# EAGLE board Super_Clokk_199774_2015_03_30 (EAGLE 7.7.0), part 1 of 2
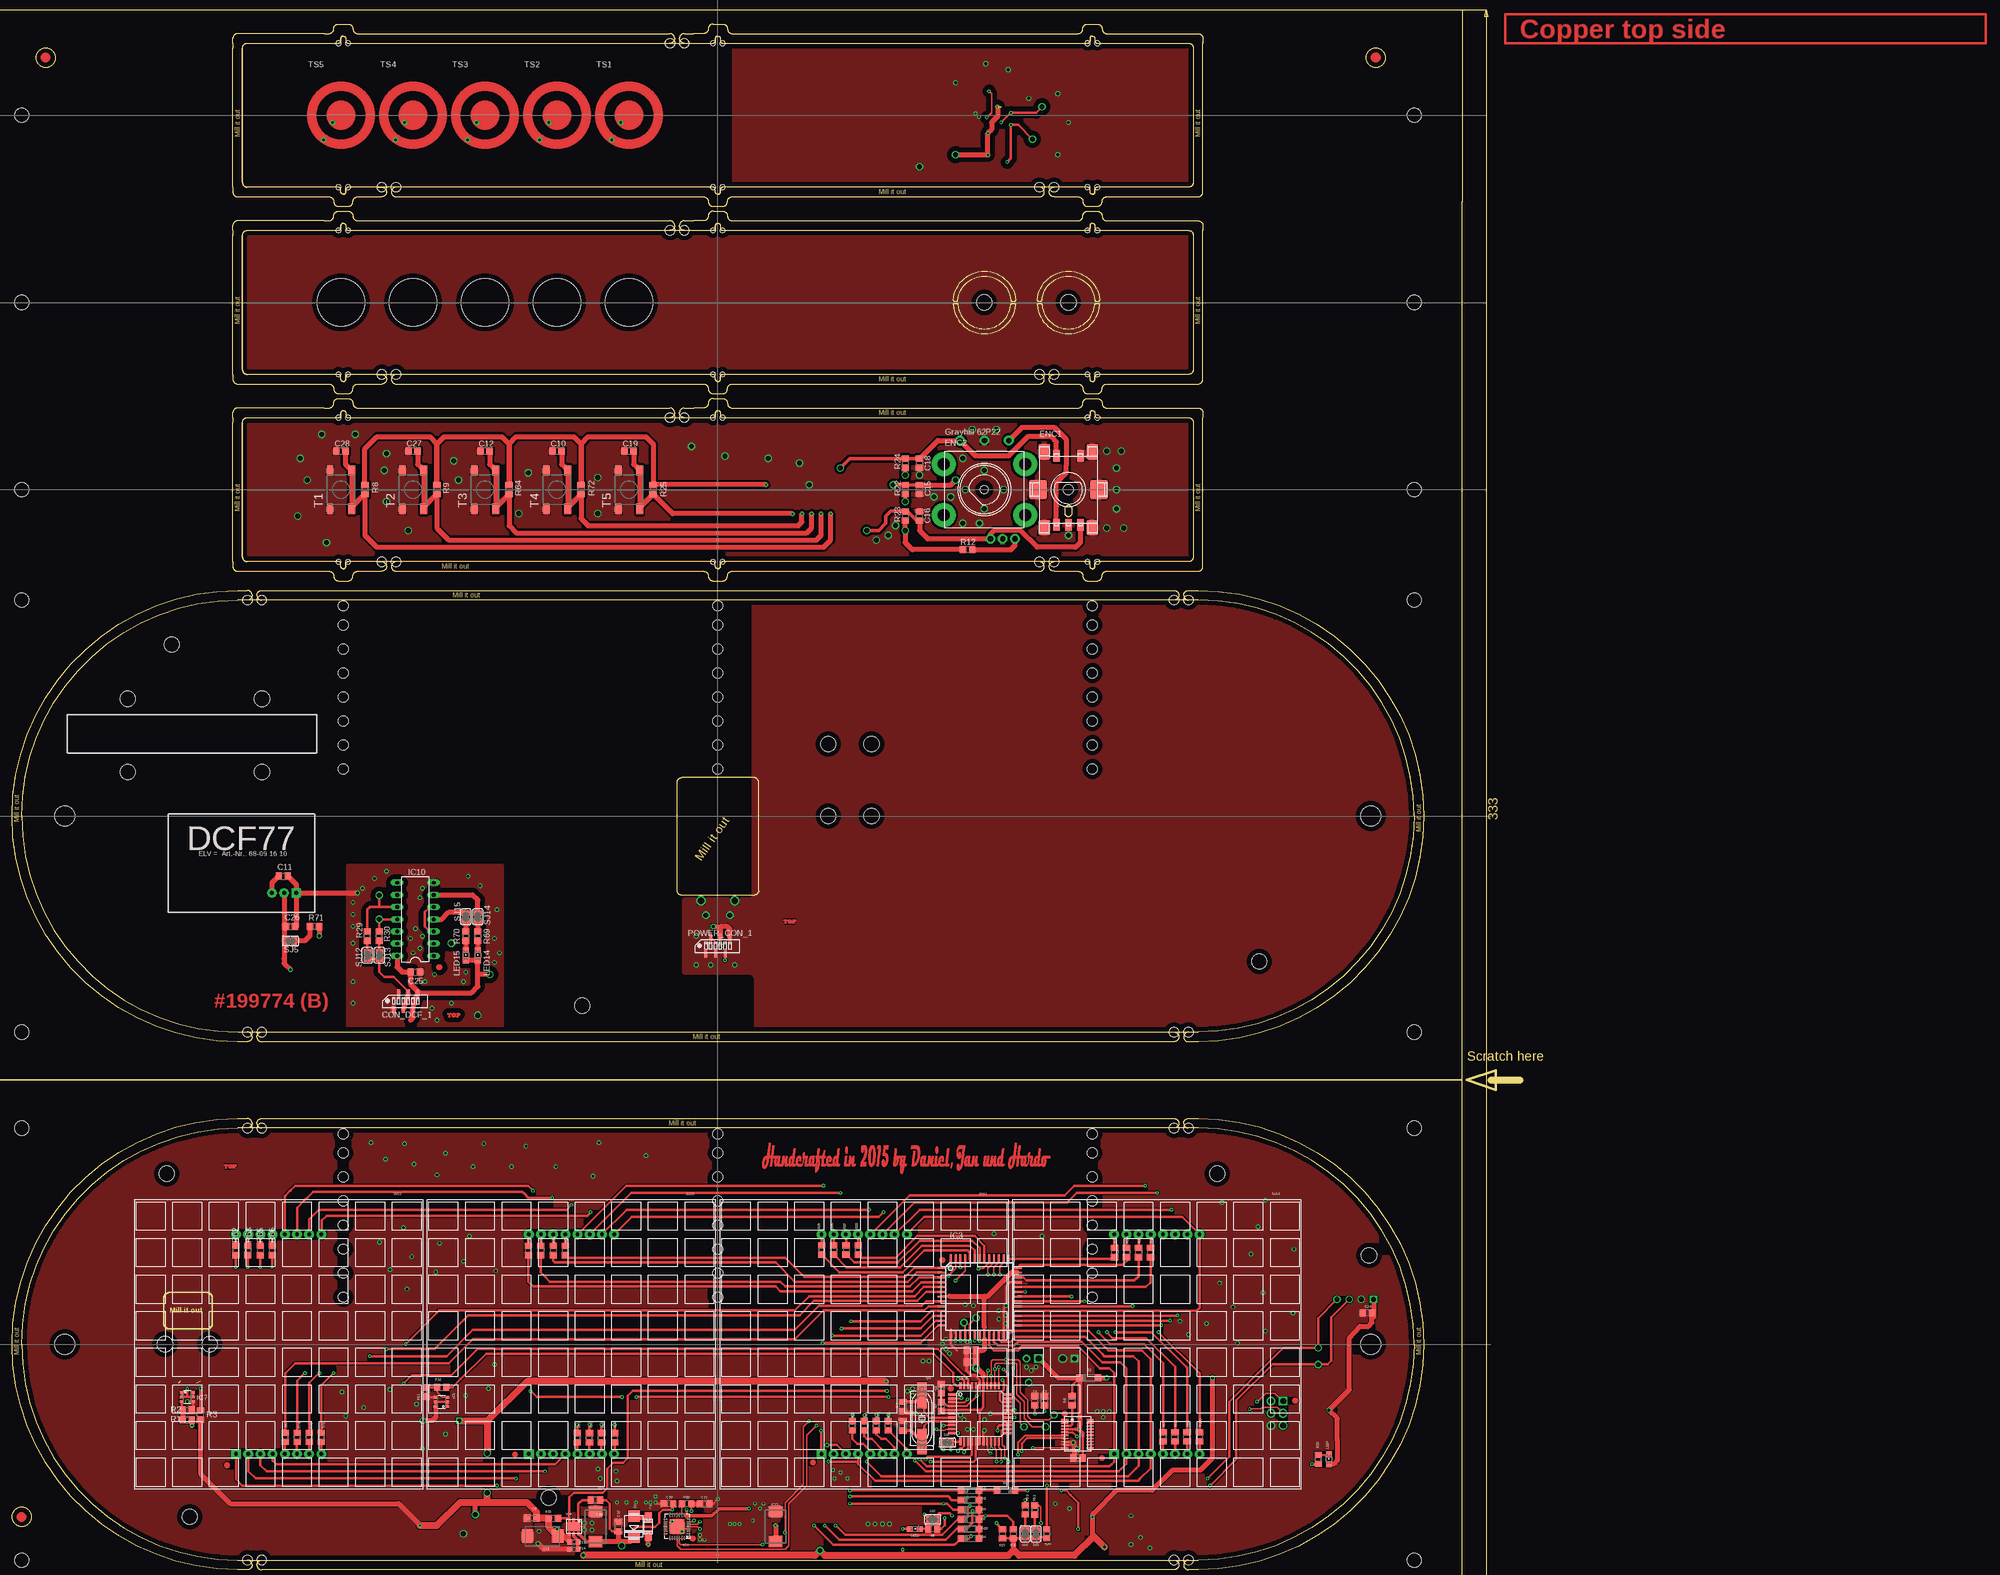
[diagram p0: board, top side]
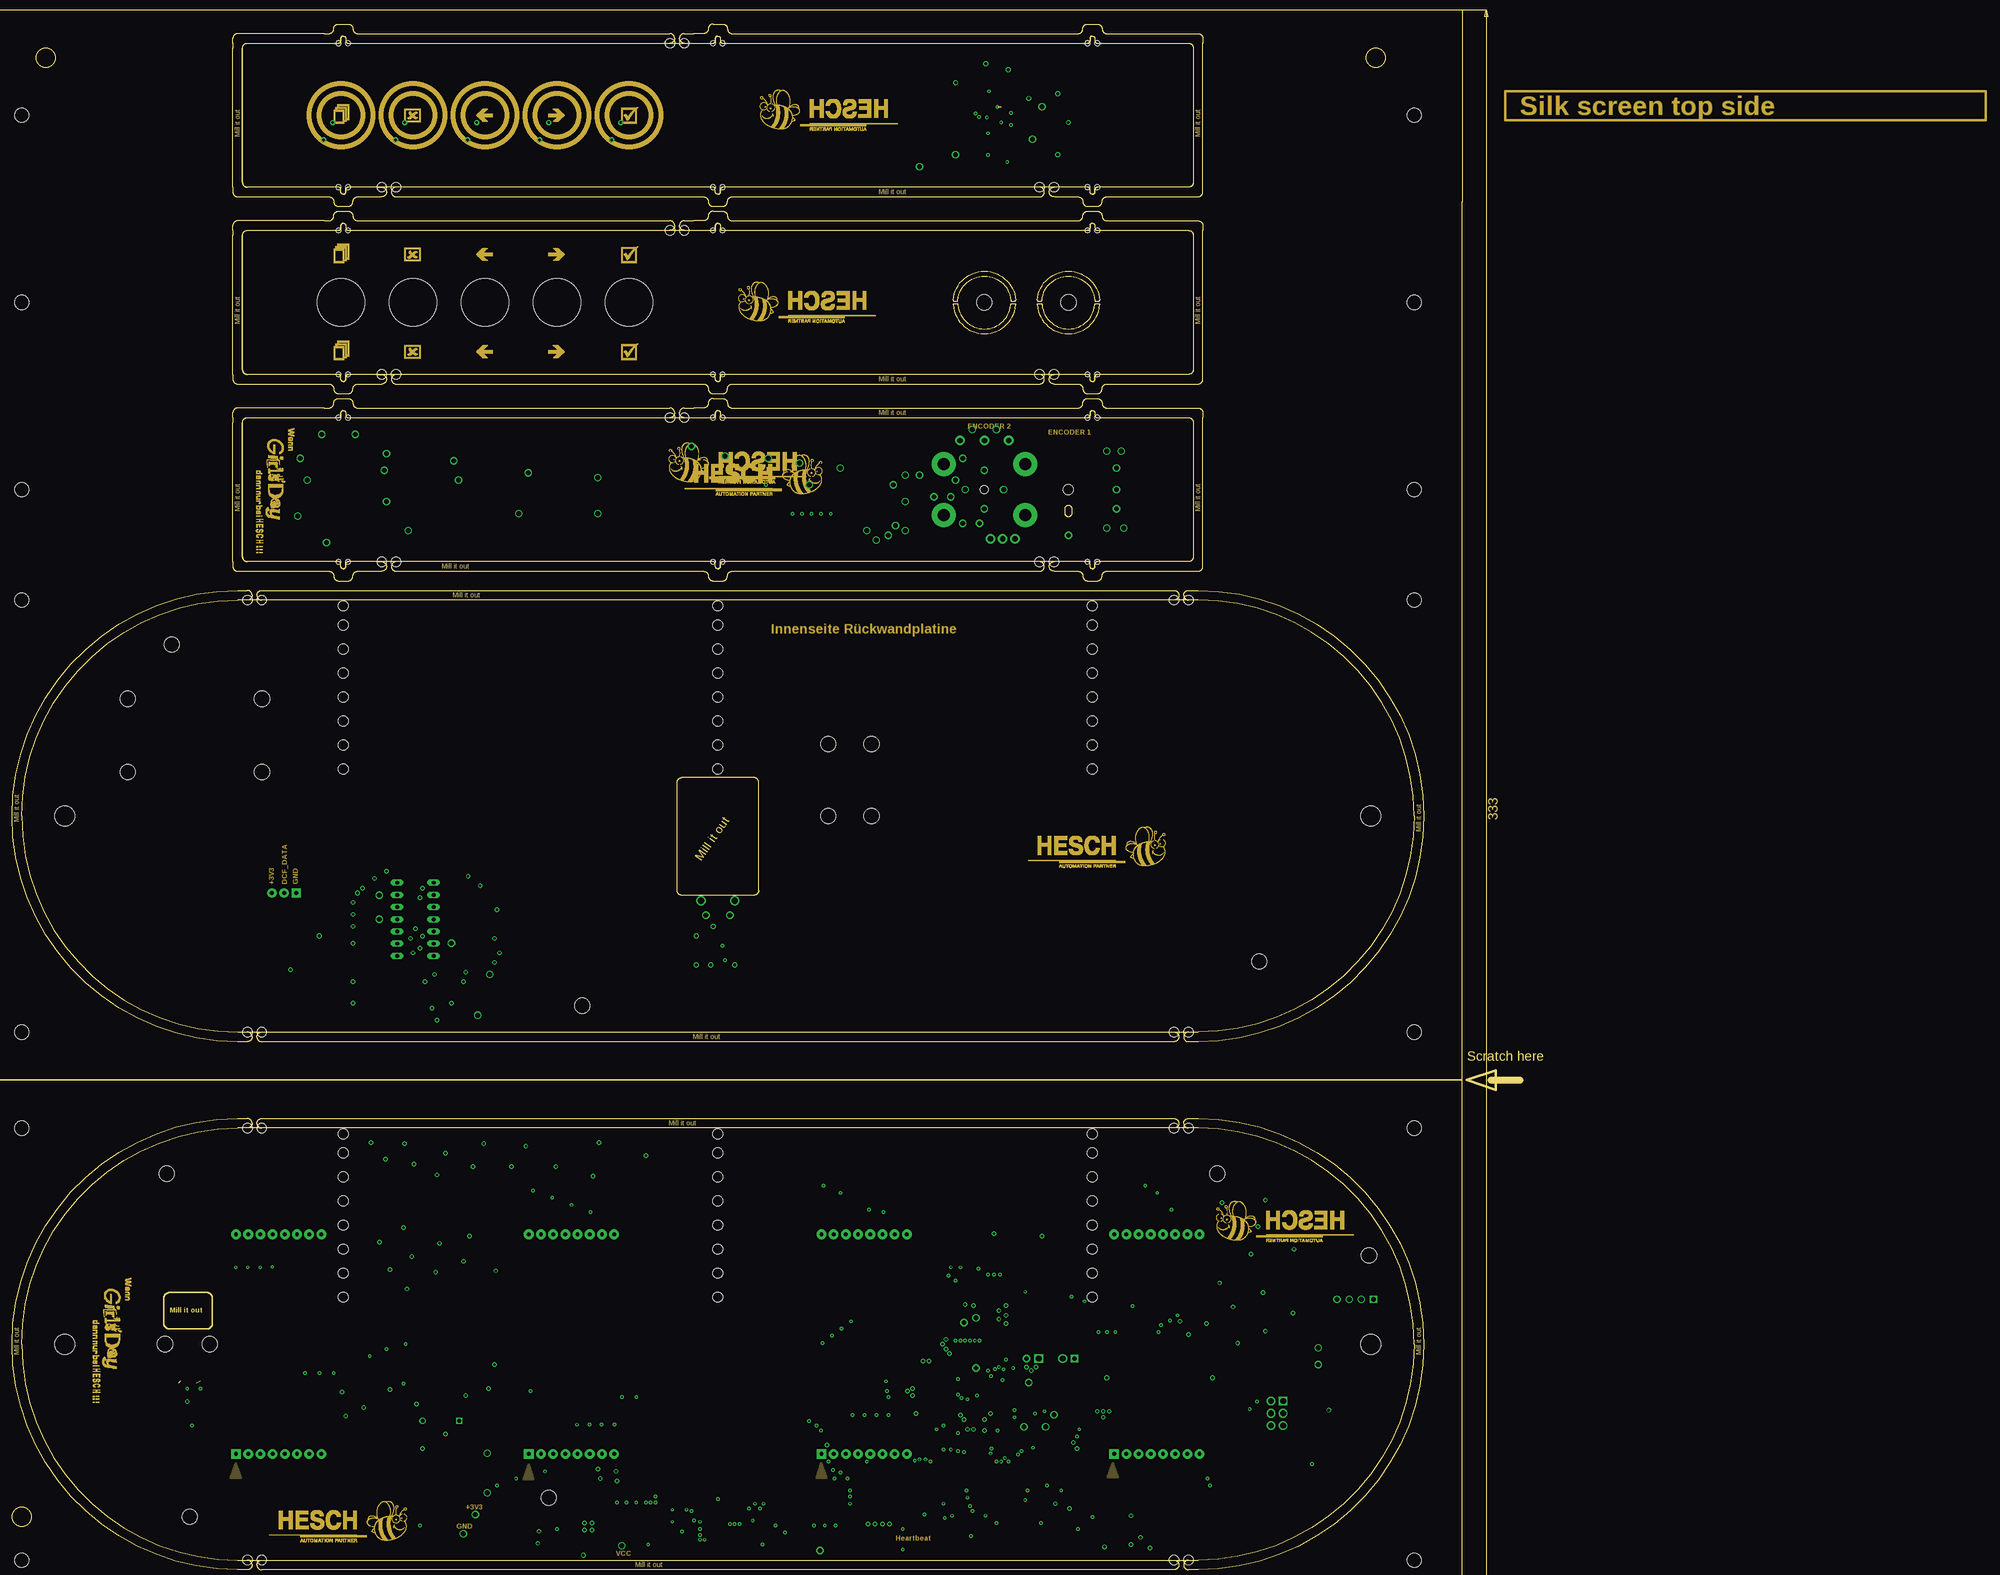
[diagram p1: board, inner layer Route2]
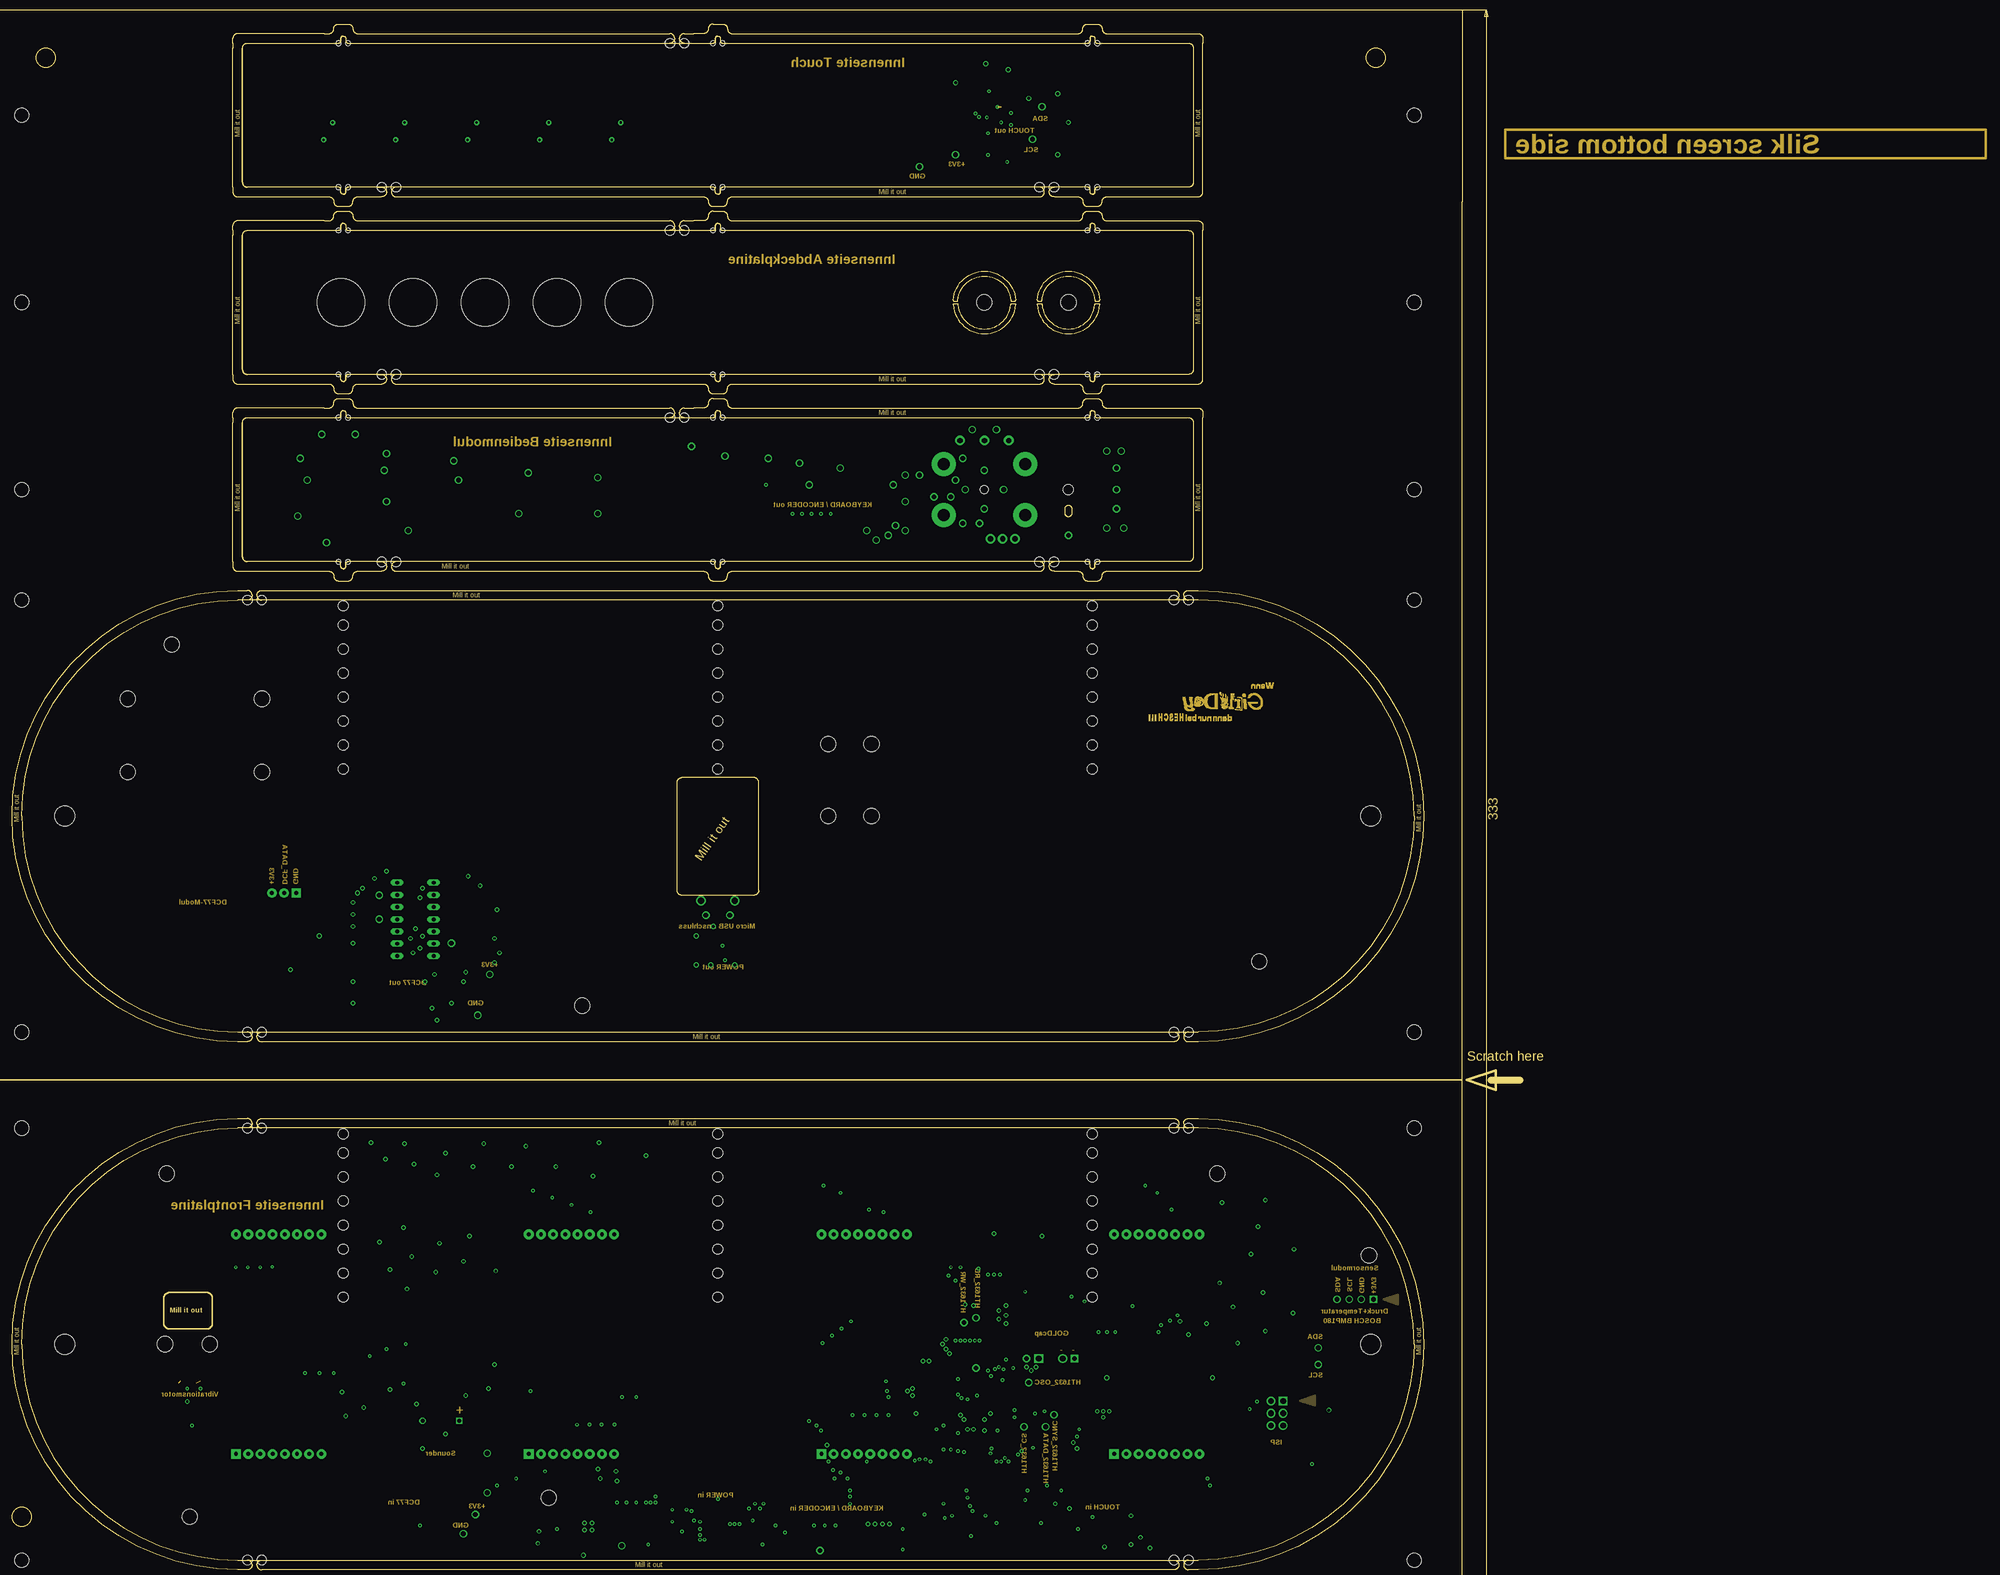
[diagram p2: board, inner layer Route15]
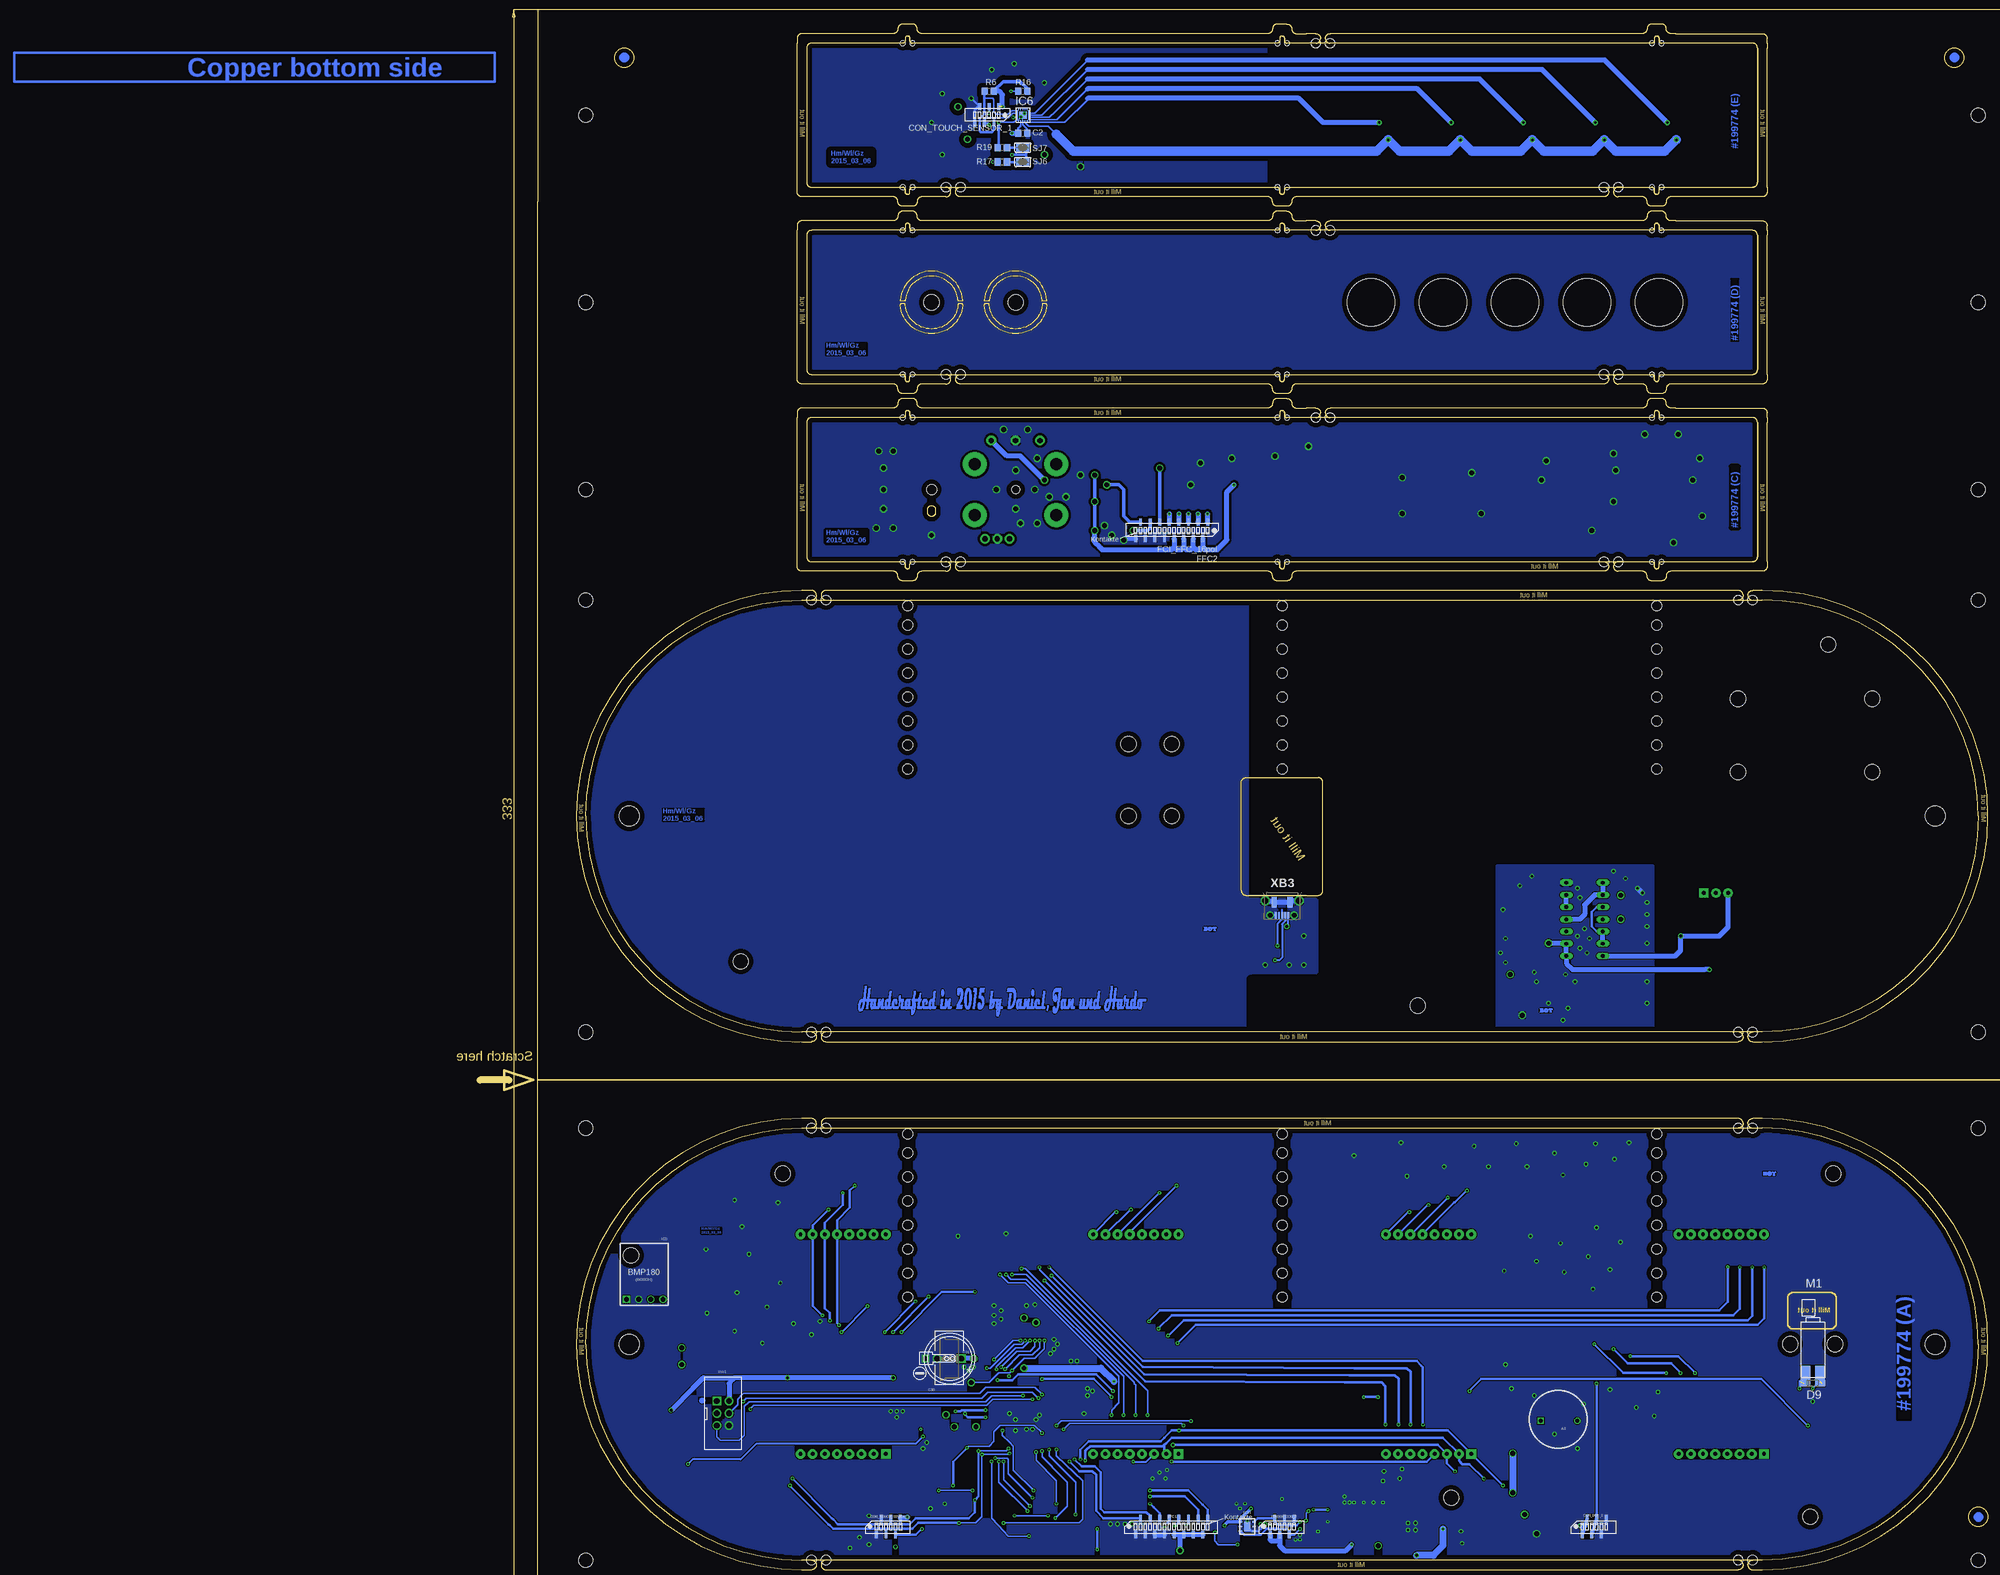
[diagram p3: board, bottom side, seen from below]

Size 292 x 317.5 mm. Coordinates in mm from the lower left corner, seen from the top.
Copper layers (1*16): Top 0.035mm / dielectric 1.5mm / Bottom 0.035mm
Design rules "default *": minimum track width 10mil, minimum drill 24mil, track to track 8mil, track to pad 8mil, pad to pad 8mil, via to via 8mil, smd to smd 8mil, copper to edge 40mil, drill to drill 8mil, minimum pad ring 10mil, minimum via ring 8mil, stop-mask expansion 4mil, vias tented up to drill 50mil, thermal gap 10mil
Holes 10 mm at 128.5,262 113.5,262 98.5,262 83.5,262 68.5,262
Holes 3.2 mm at 33.25,190.75 259.75,124.75 118.75,115.5 32.25,80.5 251,80.5 111.75,13 170,170 170,155 179,170 179,155 37,9 202.5,262 220,262
tRestrict: area 48,286 to 148,316
bRestrict: area 48,286 to 148,316
Milling: 40 lines

## Footprints (pad centres in the part's own frame; a part is rotated, then mirrored left to right if it is on the bottom)
FUCW03 = drill 0.8 square: + -3.91,0 | drill 0.8: - 3.71,0
18X23MM = drill 0.8 pad 1.93 square: 1 26.7,3.96 | drill 0.8 pad 1.93: 2 24.16,3.96; 3 21.62,3.96 | hole 3.2: -8.37,29.21; -8.37,44.45; 19.57,29.21; 19.57,44.45
C0805 = smd 1.3 x 1.5: 1 -0.95,0; 2 0.95,0
C0805K = smd 1.3 x 1.6: 1 -1,0; 2 1,0
SMC_D = smd 2.4 x 2.8: + -3.15,0; - 3.15,0
PANASONIC_SD_SERIES_STEHEND = drill 1.2 square: + -2.54,-6.35 | drill 1.2: - 2.46,-6.35
PANASONIC_SD_SERIES_LIEGEND = drill 1 square: MINUS 10,0 | drill 1: PLUS 0,0
MOLEX_52808-0671_NON_ZIF = smd 0.6 x 1.45: 1 -2.5,-1.75; 2 -1.5,1.7; 3 -0.5,-1.75; 4 0.5,1.7; 5 1.5,-1.75; 6 2.5,1.7
SOD123 = smd 1.4 x 1.4: A 1.9,0; C -1.9,0
DO-214AA/SMB = smd 2.4 x 2.4: A 2.2,0; C -2.2,0
TOYO = drill 0.8 pad 2 square: 1 -8.89,-22.86 | drill 0.8 pad 2: 2 -6.35,-22.86; 3 -3.81,-22.86; 4 -1.27,-22.86; 5 1.27,-22.86; 6 3.81,-22.86; 7 6.35,-22.86; 8 8.89,-22.86; 9 8.89,22.86; 10 6.35,22.86; 11 3.81,22.86; 12 1.27,22.86; 13 -1.27,22.86; 14 -3.81,22.86; 15 -6.35,22.86; 16 -8.89,22.86
BOURNS_PEC11S = smd 1.3 x 2.4: A -2.5,-7.3; B 2.5,-7.3; C 0,-7.3; D -2.5,7; E 2.5,7 | smd 2.5 x 3.2: SHIELD_1 -5,-7.9; SHIELD_2 5,-7.9; SHIELD_4 5,7.9; SHIELD_5 -5,7.9 | smd 3.75 x 4: SHIELD_3 6.375,0; SHIELD_6 -6.375,0 | hole 2.1: 0,0
62P22 = drill 1.1 pad 2: 1 6.35,-10.236; 2 3.81,-10.236; 3 1.27,-10.236; 4 5.08,10.236; 5 0,10.236; 6 -5.08,10.236 | drill 2.5 pad 5: FASTENER_1 8.495,5.27; FASTENER_2 -8.505,5.27; FASTENER_3 8.495,-5.27; FASTENER_4 -8.505,-5.27 | hole 1.7: 0,0
1206L = smd 2.16 x 1.4: 1 -1.85,0; 2 1.85,0
MOLEX_52808_1671_NON_ZIF = smd 0.6 x 1.45: 1 -7.5,-1.75; 2 -6.5,1.7; 3 -5.5,-1.75; 4 -4.5,1.7; 5 -3.5,-1.75; 6 -2.5,1.7; 7 -1.5,-1.75; 8 -0.5,1.7; 9 0.5,-1.75; 10 1.5,1.7; 11 2.5,-1.75; 12 3.5,1.7; 13 4.5,-1.75; 14 5.5,1.7; 15 6.5,-1.75; 16 7.5,1.7
QFN28 = smd 1 x 0.3: 1 -2.4,1.5; 2 -2.4,1; 3 -2.4,0.5; 4 -2.4,0; 5 -2.4,-0.5; 6 -2.4,-1; 7 -2.4,-1.5; 15 2.4,-1.5; 16 2.4,-1; 17 2.4,-0.5; 18 2.4,0; 19 2.4,0.5; 20 2.4,1; 21 2.4,1.5 | smd 0.3 x 1: 8 -1.5,-2.4; 9 -1,-2.4; 10 -0.5,-2.4; 11 0,-2.4; 12 0.5,-2.4; 13 1,-2.4; 14 1.5,-2.4; 22 1.5,2.4; 23 1,2.4; 24 0.5,2.4; 25 0,2.4; 26 -0.5,2.4; 27 -1,2.4; 28 -1.5,2.4 | smd 3 x 3: THERMAL 0,0
VSOJ20 = smd 0.35 x 1.5: 1 0,0; 2 0.65,0; 3 1.3,0; 4 1.95,0; 5 2.6,0; 6 3.25,0; 7 3.9,0; 8 4.55,0; 9 5.2,0; 10 5.85,0; 11 5.85,5.3; 12 5.2,5.3; 13 4.55,5.3; 14 3.9,5.3; 15 3.25,5.3; 16 2.6,5.3; 17 1.95,5.3; 18 1.3,5.3; 19 0.65,5.3; 20 0,5.3
52PIN_OFP = smd 0.4 x 1.7: 1 -6,-7.9; 2 -5,-7.9; 3 -4,-7.9; 4 -3,-7.9; 5 -2,-7.9; 6 -1,-7.9; 7 0,-7.9; 8 1,-7.9; 9 2,-7.9; 10 3,-7.9; 11 4,-7.9; 12 5,-7.9; 13 6,-7.9; 27 6,7.9; 28 5,7.9; 29 4,7.9; 30 3,7.9; 31 2,7.9; 32 1,7.9; 33 0,7.9; 34 -1,7.9; 35 -2,7.9; 36 -3,7.9; 37 -4,7.9; 38 -5,7.9; 39 -6,7.9 | smd 1.7 x 0.4: 14 7.9,-6; 15 7.9,-5; 16 7.9,-4; 17 7.9,-3; 18 7.9,-2; 19 7.9,-1; 20 7.9,0; 21 7.9,1; 22 7.9,2; 23 7.9,3; 24 7.9,4; 25 7.9,5; 26 7.9,6; 40 -7.9,6; 41 -7.9,5; 42 -7.9,4; 43 -7.9,3; 44 -7.9,2; 45 -7.9,1; 46 -7.9,0; 47 -7.9,-1; 48 -7.9,-2; 49 -7.9,-3; 50 -7.9,-4; 51 -7.9,-5; 52 -7.9,-6
DFN6 = smd 0.7 x 0.45: 1 -1.37,0.953; 2 -1.37,0.003; 3 -1.37,-0.947; 4 1.43,-0.947; 5 1.43,0.003; 6 1.43,0.953 | smd 1.75 x 2.5: EXP 0.03,0.003
SOT457 = smd 0.55 x 0.8: 1 -0.95,-1.2; 2 0,-1.2; 3 0.95,-1.2; 4 0.95,1.2; 5 0,1.2; 6 -0.95,1.2
VQFN-20 = smd 0.4 x 0.22: 1 1.24,0.9; 2 1.24,0.45; 3 1.24,0; 4 1.24,-0.45; 5 1.24,-0.9; 11 -1.24,-0.9; 12 -1.24,-0.45; 13 -1.24,0; 14 -1.24,0.45; 15 -1.24,0.9 | smd 0.22 x 0.4: 6 0.9,-1.24; 7 0.45,-1.24; 8 0,-1.24; 9 -0.45,-1.24; 10 -0.9,-1.24; 16 -0.9,1.24; 17 -0.45,1.24; 18 0,1.24; 19 0.45,1.24; 20 0.9,1.24 | smd 1.55 x 1.55: EXP. 0,0
TQFP44 = smd 1.5 x 0.5: 1 -5.8,4; 2 -5.8,3.2; 3 -5.8,2.4; 4 -5.8,1.6; 5 -5.8,0.8; 6 -5.8,0; 7 -5.8,-0.8; 8 -5.8,-1.6; 9 -5.8,-2.4; 10 -5.8,-3.2; 11 -5.8,-4; 23 5.8,-4; 24 5.8,-3.2; 25 5.8,-2.4; 26 5.8,-1.6; 27 5.8,-0.8; 28 5.8,0; 29 5.8,0.8; 30 5.8,1.6; 31 5.8,2.4; 32 5.8,3.2; 33 5.8,4 | smd 0.5 x 1.5: 12 -4,-5.8; 13 -3.2,-5.8; 14 -2.4,-5.8; 15 -1.6,-5.8; 16 -0.8,-5.8; 17 0,-5.8; 18 0.8,-5.8; 19 1.6,-5.8; 20 2.4,-5.8; 21 3.2,-5.8; 22 4,-5.8; 34 4,5.8; 35 3.2,5.8; 36 2.4,5.8; 37 1.6,5.8; 38 0.8,5.8; 39 0,5.8; 40 -0.8,5.8; 41 -1.6,5.8; 42 -2.4,5.8; 43 -3.2,5.8; 44 -4,5.8
10X13MM = drill 1 square: 1 1.27,1.27 | drill 1: 2 3.81,1.27; 3 6.35,1.27; 4 8.89,1.27 | hole 3.2: 2.223,10.477
DIL14 = drill 0.813 long: 1 -7.62,-3.81; 2 -5.08,-3.81; 3 -2.54,-3.81; 4 0,-3.81; 5 2.54,-3.81; 6 5.08,-3.81; 7 7.62,-3.81; 8 7.62,3.81; 9 5.08,3.81; 10 2.54,3.81; 11 0,3.81; 12 -2.54,3.81; 13 -5.08,3.81; 14 -7.62,3.81
DRS = smd 0.35 x 0.9: 1 -0.95,-1.425; 2 0,-1.425; 3 0.95,-1.425; 4 0.95,1.425; 5 0,1.425; 6 -0.95,1.425 | smd 1.9 x 1.2: THERMAL 0,0
CHIPLED_0805 = smd 1.2 x 1.2: A 0,-1.05; C 0,1.05
LA4-432A = smd 4 x 2: 1 -0.5,-1.5; 2 -0.5,1.5 | hole 3.2: -7,4.65; -7,-4.65
PLATINENKONTUR_310X220_FULLY_ROUNDED = hole 4.2: 19,55; 291,55; 19,165; 291,165 | hole 2: 253,100; 250,100; 253,10; 250,10; 57,10; 60,10; 57,100; 60,100; 253,210; 250,210; 253,120; 250,120; 57,120; 60,120; 57,210; 60,210; 85,218; 88,218; 225,218; 222,218; 145,248; 148,248; 85,257; 88,257; 225,257; 222,257; 145,287; 148,287; 85,296; 88,296; 225,296; 222,296; 145,326; 148,326 | hole 3: 10,210; 300,210; 300,120; 300,100; 300,10; 10,10; 10,120; 10,100; 300,272; 300,233; 10,233; 10,272; 300,311; 10,311 | hole 1: 76,218; 78,218; 78,248; 76,248; 154,218; 156,218; 154,248; 156,248; 234,248; 232,248; 232,218; 234,218; 76,257; 78,257; 78,287; 76,287; 154,257; 156,257; 154,287; 156,287; 234,287; 232,287; 232,257; 234,257; 76,296; 78,296; 78,326; 76,326; 154,296; 156,296; 154,326; 156,326; 234,326; 232,326; 232,296; 234,296 | hole 2.1: 77,208.8; 77,204.8; 77,199.8; 77,194.8; 77,189.8; 77,184.8; 77,179.8; 77,174.8; 77,98.8; 77,94.8; 77,89.8; 77,84.8; 77,79.8; 77,74.8; 77,69.8; 77,64.8; 155,98.8; 155,94.8; 155,89.8; 155,84.8; 155,79.8; 155,74.8; 155,69.8; 155,64.8; 233,98.8; 233,94.8; 233,89.8; 233,84.8; 233,79.8; 233,74.8; 233,69.8; 233,64.8; 155,208.8; 155,204.8; 155,199.8; 155,194.8; 155,189.8; 155,184.8; 155,179.8; 155,174.8; 233,208.8; 233,204.8; 233,199.8; 233,194.8; 233,189.8; 233,184.8; 233,179.8; 233,174.8
HC49 = smd 5.334 x 1.93: 1 -4.826,0; 2 4.826,0
R0805 = smd 1.3 x 1.5: 1 -0.95,0; 2 0.95,0
R0603 = smd 1 x 1.1: 1 -0.85,0; 2 0.85,0
SJ = smd 1.168 x 1.6: 1 -0.762,0; 2 0.762,0
B3S-1002P = smd 2.1 x 1.4: 1 4,-2.25; 2 -4,-2.25; 3 4,2.25; 4 -4,2.25
THT-1X2,54 = drill 1 pad 1.5: TP 0,0
TOUCH_SENSOR_14MM = drill 0.5: GUARD -3.61,-5.12; TOUCH -1.73,-1.54
MICRO_NEU = smd 0.4 x 1.35: 1 -1.3,4.15; 2 -0.65,4.15; 3 0,4.15; 4 0.65,4.15; 5 1.3,4.15 | drill 1.3: 6 -3.5,1.15; 7 3.5,1.15 | drill 1: 8 -2.5,4.15; 9 2.5,4.15 | smd 1.1 x 2.1: 10 -1.65,1.45; 11 1.65,1.45
WSL = drill 1.2 square: 1 -2.54,-1.27 | drill 1.2: 2 -2.54,1.27; 3 0,-1.27; 4 0,1.27; 5 2.54,-1.27; 6 2.54,1.27

## Placement (x,y rotation side)
A1  FUCW03THT  [FUCW03]  89.22,29.04 0 bottom
A3  ELV68-09-16-10  [18X23MM]  32.5,135 0 top
C1  100n  [C0805]  222,21.25 180 top
C2  100n  [C0805]  201,297.25 0 bottom
C3  22p  [C0805K]  185.5,28 90 top
C4  22p  [C0805K]  185.5,32 270 top
C5  100n  [C0805]  193.5,35.75 90 top
C6  100n  [C0805]  213,33.25 90 top
C7  100n  [C0805]  215,33.25 90 top
C8  1u  [C0805K]  108.25,8.75 180 top
C9  100n  [C0805]  199.75,41.25 180 top
C10  100n  [C0805]  113.5,231 180 top
C11  100n  [C0805]  56.5,142.5 0 top
C12  100n  [C0805]  98.5,231 180 top
C14  100n  [C0805]  199.75,43.75 0 top
C15  100n  [C0805]  189,223 270 top
C16  100n  [C0805]  189,217.5 90 top
C17  1u  [C0805K]  126.25,7 90 top
C18  100n  [C0805]  189,228.5 270 top
C19  100n  [C0805]  128.5,231 180 top
C20  100n  [C0805]  136.75,11.75 180 top
C21  100n  [C0805]  144.25,11.75 0 top
C22  100µ  [SMC_D]  159,7 90 top
C23  100µ  [SMC_D]  110.5,5 180 top
C24  100n  [C0805]  282.25,51.5 180 top
C25  100n  [C0805]  84,122.5 0 top
C26  10n  [C0805]  58,132 0 top
C27  100n  [C0805]  83.5,231 180 top
C28  100n  [C0805]  68.5,231 180 top
C29  100µ  [SMC_D]  121.5,7 90 top
C30  [PANASONIC_SD_SERIES_STEHEND]  216.35,35.65 180 bottom
C31  [PANASONIC_SD_SERIES_LIEGEND]  211.25,42 180 bottom
CON_DCF_1  MOLEX_52808_0671_NON_ZIF  [MOLEX_52808-0671_NON_ZIF]  82,116.5 0 top
CON_DCF_2  MOLEX_52808_0671_NON_ZIF  [MOLEX_52808-0671_NON_ZIF]  82,7 0 bottom
CON_TOUCH_SENSOR_1  MOLEX_52808_0671_NON_ZIF  [MOLEX_52808-0671_NON_ZIF]  208.5,301 180 bottom
CON_TOUCH_SENSOR_2  MOLEX_52808_0671_NON_ZIF  [MOLEX_52808-0671_NON_ZIF]  229,7 0 bottom
D1  BAS116H-115  [SOD123]  224.25,38 0 top
D2  BAS116H-115  [SOD123]  199.5,14.5 0 top
D3  BAS116H-115  [SOD123]  199.5,12.5 0 top
D4  BAS116H-115  [SOD123]  199.5,4.5 0 top
D5  BAS116H-115  [SOD123]  199.5,8.5 0 top
D6  BAS116H-115  [SOD123]  199.5,10.5 0 top
D7  SS24R4  [DO-214AA/SMB]  129.5,7 90 top
D8  BAS116H-115  [SOD123]  207,14.5 180 top
D9  BAS116H-115  [SOD123]  36.5,36.87 0 bottom
D10  BAS116H-115  [SOD123]  199.5,6.5 0 top
DIS1  TOYO-D24882  [TOYO]  55.54,45 0 top
DIS2  TOYO-D24882  [TOYO]  116.5,45 0 top
DIS3  TOYO-D24882  [TOYO]  177.46,45 0 top
DIS4  TOYO-D24882  [TOYO]  238.42,45 0 top
ENC1  BOURNS_PEC11S  [BOURNS_PEC11S]  220,223 0 top
ENC2  Grayhill 62P22  [62P22]  202.5,223 0 top
F2  MF-NSMF200  [1206L]  132.5,7 90 top
FFC1  FCI_FFC_16pol  [MOLEX_52808_1671_NON_ZIF]  170,7 0 bottom
FFC2  FCI_FFC_16pol  [MOLEX_52808_1671_NON_ZIF]  170,214.5 180 bottom
IC1  CP2102SMD  [QFN28]  138.5,7 180 top
IC2  [VSOJ20]  219.25,29.25 270 top
IC3  HT1632-C  [52PIN_OFP]  201.5,54.9 270 top
IC4  LD39050PUR  [DFN6]  117,7 270 top
IC5  PMN28-UN  [SOT457]  89.43,32.97 90 top
IC6  AT42QT2120-MMH  [VQFN-20]  201,301 0 bottom
IC7  PMN28-UN  [SOT457]  36.5,34 270 top
IC8  MEGA32-A  [TQFP44]  201.5,30.5 0 top
IC9  BOSCH-BMP180  [10X13MM]  284.81,53.04 0 bottom
IC10  4093N  [DIL14]  84,133.5 90 top
IC11  TPD2E001DRSR  [DRS]  154.25,7 270 bottom
LED2  [CHIPLED_0805]  188,6.5 270 top
LED7  [CHIPLED_0805]  274.25,21 0 top
LED14  [CHIPLED_0805]  97,126 0 top
LED15  [CHIPLED_0805]  94.5,126 0 top
M1  VIBROMOTORTHT432A  [LA4-432A]  36.5,38 270 bottom
MAINFRAME  [PLATINENKONTUR_310X220_FULLY_ROUNDED]  -8,-10 0 top
POWER_CON_1  FCI_FFC_6_pol  [MOLEX_52808-0671_NON_ZIF]  147,128 0 top
POWER_CON_2  FCI_FFC_6_pol  [MOLEX_52808-0671_NON_ZIF]  147,7 0 bottom
Q2  HC49-U / 16 MHz  [HC49]  189.5,29.5 90 top
R1  1k  [R0805]  36.5,29.25 0 top
R2  100k  [R0805]  36.5,31.25 0 top
R3  47R  [R0805]  39.25,30.25 90 top
R4  1k  [R0805]  220.75,33.25 90 top
R5  1k  [R0805]  191.75,6.5 180 top
R6  10k  [R0805]  208,306 0 bottom
R7  100k  [R0805]  193.5,32 270 top
R8  100k  [R0805]  73.5,223 270 top
R9  100k  [R0805]  88.5,223 270 top
R10  1k  [R0805]  89.5,36 0 top
R11  100k  [R0805]  86.25,35 270 top
R12  100R  [R0805]  199,210.5 180 top
R13  470k  [R0603]  117,3.75 0 top
R14  150k  [R0603]  117,2.25 180 top
R15  100k  [R0805]  112.75,8.75 0 top
R16  10k  [R0805]  201,306 0 bottom
R17  10k  [R0805]  205.25,291.25 180 bottom
R18  1k  [R0805]  272,21 90 top
R19  10k  [R0805]  205.25,294.25 180 bottom
R20  100k  [R0805]  215.5,5.5 270 top
R21  100k  [R0805]  121.5,12.5 180 top
R22  10k  [R0805]  186,223 270 top
R23  10k  [R0805]  186,217.5 270 top
R24  10k  [R0805]  186,228.5 270 top
R25  100k  [R0805]  133.5,223 270 top
R26  100k  [R0805]  208.5,5.5 270 top
R27  100k  [R0805]  206.25,5.5 270 top
R28  100k  [R0805]  140.5,11.75 180 top
R29  1k  [R0805]  74,130 90 top
R30  1k  [R0805]  76.5,130 90 top
R52  4,7k  [R0805]  212.98,10.45 270 top
R53  4,7k  [R0805]  211,10.5 270 top
R62  22R  [R0805]  46.6,64.5 270 top
R63  22R  [R0805]  49.1,64.5 270 top
R64  100k  [R0805]  103.5,223 270 top
R65  22R  [R0805]  51.7,64.5 270 top
R66  22R  [R0805]  54.2,64.5 270 top
R67  22R  [R0805]  56.9,25.6 90 top
R69  1k  [R0805]  97,130 270 top
R70  1k  [R0805]  94.5,130 270 top
R71  100k  [R0805]  63,132 180 top
R72  100k  [R0805]  118.5,223 270 top
R74  22R  [R0805]  59.4,25.6 90 top
R75  22R  [R0805]  61.9,25.6 90 top
R76  22R  [R0805]  64.4,25.6 90 top
R77  22R  [R0805]  107.5,64.5 270 top
R78  22R  [R0805]  110.1,64.5 270 top
R79  22R  [R0805]  112.7,64.5 270 top
R80  22R  [R0805]  115.2,64.5 270 top
R81  22R  [R0805]  117.7,25.5 90 top
R82  22R  [R0805]  120.25,25.5 90 top
R83  22R  [R0805]  122.75,25.5 90 top
R84  22R  [R0805]  125.5,25.5 90 top
R85  22R  [R0805]  168.6,64.6 270 top
R86  22R  [R0805]  171.1,64.6 270 top
R87  22R  [R0805]  173.7,64.6 270 top
R88  22R  [R0805]  176.2,64.6 270 top
R89  22R  [R0805]  175,28 90 top
R90  22R  [R0805]  177.5,28 90 top
R91  22R  [R0805]  180,28 90 top
R92  22R  [R0805]  182.5,28 90 top
R93  22R  [R0805]  229.6,64.1 270 top
R94  22R  [R0805]  232.1,64.1 270 top
R95  22R  [R0805]  234.6,64.1 270 top
R96  22R  [R0805]  237.1,64.1 270 top
R97  22R  [R0805]  239.7,25.7 90 top
R98  22R  [R0805]  242.2,25.7 90 top
R99  22R  [R0805]  244.7,25.7 90 top
R100  22R  [R0805]  247.3,25.7 90 top
REF1  [PASSER_2MM]  2,9 0 top
REF2  [PASSER_2MM]  7,313 0 top
REF3  [PASSER_2MM]  284,313 0 top
SJ1  [SJ]  194.75,24.5 180 top
SJ2  [SJ]  191.75,8.5 0 top
SJ3  [SJ]  213.25,5.5 270 top
SJ4  [SJ]  211,5.5 270 top
SJ5  [SJ]  58,129 180 top
SJ6  [SJ]  201,291.25 0 bottom
SJ7  [SJ]  201,294.25 0 bottom
SJ12  [SJ]  74,126 90 top
SJ13  [SJ]  76.5,126 90 top
SJ14  [SJ]  97,134 90 top
SJ15  [SJ]  94.5,134 90 top
T1  OMRON-B3S-1002P  [B3S-1002P]  68.5,223 90 top
T2  OMRON-B3S-1002P  [B3S-1002P]  83.5,223 90 top
T3  OMRON-B3S-1002P  [B3S-1002P]  98.5,223 90 top
T4  OMRON-B3S-1002P  [B3S-1002P]  113.5,223 90 top
T5  OMRON-B3S-1002P  [B3S-1002P]  128.5,223 90 top
TP1  [THT-1X2,54]  210.75,27.75 180 top
TP2  [THT-1X2,54]  200.75,50.5 180 top
TP3  [THT-1X2,54]  198.25,49.5 180 top
TP4  [THT-1X2,54]  215.25,27.75 180 top
TP5  [THT-1X2,54]  272,44.25 180 top
TP6  [THT-1X2,54]  272,40.75 180 top
TP7  [THT-1X2,54]  76.5,133.5 0 top
TP8  [THT-1X2,54]  96.5,9.5 0 top
TP9  [THT-1X2,54]  94,5.5 0 top
TP10  [THT-1X2,54]  127,3 0 top
TP11  [THT-1X2,54]  211.75,37 180 top
TP12  [THT-1X2,54]  212.5,296 180 top
TP13  [THT-1X2,54]  214.5,302.75 180 top
TP14  [THT-1X2,54]  97,113.5 90 top
TP15  [THT-1X2,54]  91.5,128.5 90 top
TP16  [THT-1X2,54]  217,30.25 180 top
TP17  [THT-1X2,54]  76.5,138.5 90 top
TP18  [THT-1X2,54]  99.5,122 90 top
TP19  [THT-1X2,54]  196.5,292.75 180 top
TP20  [THT-1X2,54]  189,290.25 180 top
TS1  [TOUCH_SENSOR_14MM]  128.5,301 0 top
TS2  [TOUCH_SENSOR_14MM]  113.5,301 0 top
TS3  [TOUCH_SENSOR_14MM]  98.5,301 0 top
TS4  [TOUCH_SENSOR_14MM]  83.5,301 0 top
TS5  [TOUCH_SENSOR_14MM]  68.5,301 0 top
U$1  [BOT]  162,131.5 0 top
U$2  [HANDCRAFTED_WL_HM_GZ]  156.25,80.5 0 top
U$3  [TOP]  92,113.5 0 top
U$4  [TOP]  162,133 0 top
U$5  [TOP]  45.5,82 0 top
U$6  [BOT]  45.5,80.5 0 top
U$7  [WENN_GIRLSDAY_DANN_NUR_BEI_HESCH_LAYER_2]  55,223 270 top
U$8  [BOT]  92,114.5 0 top
U$9  [HANDCRAFTED_WL_HM_GZ]  235.25,113.25 0 bottom
U$10  [BESCHRIFTUNG_MECHANISCHE_TASTEN]  67,270.25 0 top
U$11  [BESCHRIFTUNG_MECHANISCHE_TASTEN]  67,250 0 top
U$12  [WENN_GIRLSDAY_DANN_NUR_BEI_HESCH_LAYER_15]  250,179 0 top
U$13  [BESCHRIFTUNG_MECHANISCHE_TASTEN]  67,299.25 0 top
U$17  [HESCH_LOGO_BIENE_LAYER_15]  174.5,301.5 0 bottom
U$18  [HESCH_LOGO_BIENE_LAYER_2]  63.5,7.5 0 top
U$19  [HESCH_LOGO_BIENE_LAYER_2]  150,225.5 0 top
U$20  [HESCH_LOGO_BIENE_LAYER_2]  221.5,148 0 top
U$21  [HESCH_LOGO_BIENE_LAYER_15]  170,261.5 0 bottom
U$22  [HESCH_LOGO_BIENE_LAYER_15]  155.5,228 0 bottom
U$23  [HESCH_LOGO_BIENE_LAYER_15]  269.5,70 0 bottom
U$24  [WENN_GIRLSDAY_DANN_NUR_BEI_HESCH_LAYER_2]  21,46 270 top
XB3  MICRODX4R005JJ2  [MICRO_NEU]  147,138.5 180 bottom
XW1  [WSL]  263.45,30.59 270 bottom

## Library data of the parts
A1 = Summer -  FUCW03
A3 = DCF77 - Empfangsmodul (ELV)
C1 C2 C5-C7 C9-C12 C14-C16 C18-C29 R1-R12 R15-R30 R52 R53 R62-R67 R69-R72 R74-R100 = rcl
C3 C4 C8 C17 R13 R14 = resistor
C30 C31 = Kondensator - GoldCaps
CON_DCF_1 CON_DCF_2 CON_TOUCH_SENSOR_1 CON_TOUCH_SENSOR_2 FFC1 FFC2 POWER_CON_1 POWER_CON_2 = Connectors
D1-D10 = Dioden
DIS1-DIS4 = LED - 8 x 8 Matrix
ENC1 = ALPS
ENC2 = Grayhill
F2 = Sicherung - SMD PTC
IC1 = USB Treiber - CP2102
IC2 = Echtzeituhr - RTC8564JE
IC3 = LED Matrix Treiber - HT1632C
IC4 = Spannungsregler - LD39050
IC5 IC7 = Transistor - FET N Channel PMN28UN
IC6 = Touch Controller - ATMEL AT42QT2120
IC8 = atmel; MPN: ATMEGA32-16AU; OC_FARNELL: 9171274; OC_NEWARK: 69K6677
IC9 = Drucksensormodul - BMP180
IC10 = 40_er Reihe (DIN Europa)
IC11 = USB - Suppressor Dioden
LED2 LED7 LED14 LED15 = led
M1 = Motor - Vibrationsmotor
MAINFRAME = FRAME_SUPER_CLOKK_2015
Q2 = Quarz - HC49UP
REF1-REF3 = Passermarken
SJ1-SJ7 SJ12-SJ15 = jumper
T1-T5 = Taster - Omron B3S-1002P
TP1-TP20 = PAD_s
TS1-TS5 = Sensor_Touch
U$1 U$3-U$6 U$8 U$17-U$23 = !!!Bezeichnungen - Symbole - Hinweise!!!
U$2 U$9 = Schriftzug_Handcrafted
U$7 U$12 U$24 = Dice_Symboliken
U$10 U$11 U$13 = Beschriftung_Mechanische_Tasten
XB3 = USB - Verbinder
XW1 = Atmel - ISP_6   (AVR ISP MKII)

## Nets
+3V3: A1.+ C8.1 C9.1 C14.2 C23.+ C24.1 CON_DCF_2.1 CON_DCF_2.2 CON_TOUCH_SENSOR_2.6 D1.A FFC1.9 FFC1.11 FFC1.13 FFC1.15 IC3.7 IC3.21 IC3.38 IC4.4 IC8.5 IC8.17 IC8.38 IC9.1 LED2.A LED7.A R3.1 R7.2 R13.1 R15.1 R20.2 R26.2 R27.2 SJ3.2 SJ4.2 TP8.TP XW1.2
+3V3_TOUCH_SENSOR_MODUL: C2.1 CON_TOUCH_SENSOR_1.1 IC6.9 R6.2 R16.2 SJ6.2 SJ7.2 TP19.TP
ABORT_ALL_FUNCTIONS: C19.1 FFC2.1 R25.2 T5.1 T5.2
ABORT_ALL_FUNCTIONS_TO_CONNECTOR: D2.C FFC1.16 IC8.25
AREF: C7.1 IC8.29
AVCC: C6.1 IC8.27
CHANGE_INT_TOUCH: CON_TOUCH_SENSOR_1.2 IC6.15 R6.1
CLKOUT: IC2.5 R18.1
COL_0: DIS1.1 DIS2.1 DIS3.1 DIS4.1 IC3.22
COL_1: DIS1.2 DIS2.2 DIS3.2 DIS4.2 IC3.23
COL_2: DIS1.3 DIS2.3 DIS3.3 DIS4.3 IC3.24
COL_3: DIS1.4 DIS2.4 DIS3.4 DIS4.4 IC3.26
COL_4: DIS1.12 DIS2.12 DIS3.12 DIS4.12 IC3.27
COL_5: DIS1.11 DIS2.11 DIS3.11 DIS4.11 IC3.28
COL_6: DIS1.10 DIS2.10 DIS3.10 DIS4.10 IC3.29
COL_7: DIS1.9 DIS2.9 DIS3.9 DIS4.9 IC3.30
CP2102_RESET: IC1.9 R28.2
CP2102_RXD: IC1.25 IC8.10
CP2102_TXD: IC1.26 IC8.9
D1_ROW0: DIS1.16 R62.1
D1_ROW1: DIS1.15 R63.1
D1_ROW2: DIS1.14 R65.1
D1_ROW3: DIS1.13 R66.1
D1_ROW4: DIS1.5 R67.1
D1_ROW5: DIS1.6 R74.1
D1_ROW6: DIS1.7 R75.1
D1_ROW7: DIS1.8 R76.1
D2_ROW0: DIS2.16 R77.1
D2_ROW1: DIS2.15 R78.1
D2_ROW2: DIS2.14 R79.1
D2_ROW3: DIS2.13 R80.1
D2_ROW4: DIS2.5 R81.1
D2_ROW5: DIS2.6 R82.1
D2_ROW6: DIS2.7 R83.1
D2_ROW7: DIS2.8 R84.1
D3_ROW0: DIS3.16 R85.1
D3_ROW1: DIS3.15 R86.1
D3_ROW2: DIS3.14 R87.1
D3_ROW3: DIS3.13 R88.1
D3_ROW4: DIS3.5 R89.1
D3_ROW5: DIS3.6 R90.1
D3_ROW6: DIS3.7 R91.1
D3_ROW7: DIS3.8 R92.1
D4_ROW0: DIS4.16 R93.1
D4_ROW1: DIS4.15 R94.1
D4_ROW2: DIS4.14 R95.1
D4_ROW3: DIS4.13 R96.1
D4_ROW4: DIS4.5 R97.1
D4_ROW5: DIS4.6 R98.1
D4_ROW6: DIS4.7 R99.1
D4_ROW7: DIS4.8 R100.1
D+: IC1.4 IC11.3 POWER_CON_2.5
D-: IC1.5 IC11.6 POWER_CON_2.2
DCF77_buffF_INVERTED: IC10.4 IC10.8 IC10.9 SJ15.2
DCF77_buffF_NON_INVERTED: IC10.10 IC10.12 IC10.13 R29.2 TP17.TP
DCF77_buffF_OUT_SWITCHABLE: CON_DCF_1.3 CON_DCF_1.4 SJ12.1 SJ13.1
DCF77_buffFERED_INVERTED_FROM_DCF77_MODUL: CON_DCF_2.3 CON_DCF_2.4 IC8.42
DCF77_MODUL_OUT_INVERTED: A3.2 C26.1 IC10.1 IC10.2 SJ5.2 TP15.TP
EINGABE?: D2.A D3.A D4.A D5.A D6.A D8.A D10.A R26.1 SJ2.2
ENCODER_A: C15.1 ENC1.A ENC2.4 FFC2.15 R22.1
ENCODER_A_TO_CONNECTOR: FFC1.2 IC8.16
ENCODER_B: C16.1 ENC1.B ENC2.3 FFC2.13 R23.1
ENCODER_B_TO_CONNECTOR: FFC1.4 IC8.15
GND: C1.2 C3.2 C4.2 C5.2 C6.2 C7.2 C8.2 C9.2 C14.1 C17.2 C20.2 C21.2 C22.- C23.- C24.2 C29.- C30.- C31.MINUS CON_DCF_2.5 CON_DCF_2.6 CON_TOUCH_SENSOR_2.1 CON_TOUCH_SENSOR_2.2 FFC1.1 FFC1.3 FFC1.5 FFC1.7 IC1.3 IC1.THERMAL IC2.8 IC2.9 IC3.14 IC3.25 IC3.36 IC4.2 IC4.EXP IC5.4 IC7.4 IC8.6 IC8.18 IC8.28 IC8.39 IC9.2 IC11.4 IC11.THERMAL POWER_CON_2.4 POWER_CON_2.6 R2.2 R11.2 R14.2 TP9.TP XW1.6
GND_DCF77: A3.1 C11.2 C25.2 C26.2 CON_DCF_1.1 CON_DCF_1.2 IC10.7 TP14.TP
GND_SWITCHBOARD: C10.2 C12.2 C15.2 C16.2 C18.2 C19.2 C27.2 C28.2 ENC1.C ENC1.E ENC1.SHIELD_1 ENC1.SHIELD_2 ENC1.SHIELD_3 ENC1.SHIELD_4 ENC1.SHIELD_5 ENC1.SHIELD_6 ENC2.2 ENC2.5 FFC2.10 FFC2.12 FFC2.14 FFC2.16 T1.3 T1.4 T2.3 T2.4 T3.3 T3.4 T4.3 T4.4 T5.3 T5.4
GND_TOUCH: C2.2 CON_TOUCH_SENSOR_1.5 CON_TOUCH_SENSOR_1.6 IC6.8 IC6.10 IC6.EXP. TP20.TP
GND_USB_RüCKWAND: POWER_CON_1.1 POWER_CON_1.3 XB3.5 XB3.6 XB3.7 XB3.8 XB3.9 XB3.10 XB3.11
HEARTBEAT: IC8.13 R5.1
HT1632_CS: IC3.19 IC8.32 TP1.TP
HT1632_DATA: IC3.16 IC8.35 TP4.TP
HT1632_OSC: IC3.15 IC8.37 TP11.TP
HT1632_RD: IC3.18 IC8.33 TP2.TP
HT1632_SYNC: IC3.20 IC8.36 TP16.TP
HT1632_WR: IC3.17 IC8.34 TP3.TP
INTERRUPT_TOUCH_SENSOR: CON_TOUCH_SENSOR_2.5 D8.C
LD39050-PG: IC4.3 IC8.31 R15.2
MISO: IC8.2 XW1.1
MOSI: IC8.1 XW1.4
N$1: A1.- IC5.1 IC5.2 IC5.5 IC5.6
N$2: R52.2 SJ3.1
N$3: R53.2 SJ4.1
N$4: R71.2 SJ5.1
N$5: IC7.3 R1.1 R2.1
N$6: C21.1 IC1.6 R28.1
N$7: D7.A F2.2
N$8: D9.A IC7.1 IC7.2 IC7.5 IC7.6 M1.2
N$9: D9.C M1.1 R3.2
N$10: IC3.13 R62.2
N$11: IC4.1 R21.2
N$12: IC2.3 R4.1
N$13: IC3.12 R63.2
N$14: IC4.5 R13.2 R14.1
N$15: IC5.3 R10.1 R11.1
N$16: LED2.C R5.2
N$17: IC6.7 TS1.GUARD TS2.GUARD TS3.GUARD TS4.GUARD TS5.GUARD
N$18: IC3.11 R65.2
N$19: IC10.3 IC10.5 IC10.6 SJ14.2
N$20: IC3.10 R66.2
N$21: IC3.9 R67.2
N$22: ENC2.1 R12.1
N$23: IC6.12 R16.1
N$24: IC8.12 SJ1.1 SJ2.1
N$26: LED7.C R18.2
N$27: IC6.6 TS1.TOUCH
N$28: IC6.5 TS2.TOUCH
N$29: IC6.4 TS3.TOUCH
N$30: IC6.3 TS4.TOUCH
N$31: IC6.2 TS5.TOUCH
N$33: R17.1 SJ6.1
N$34: R19.1 SJ7.1
N$38: IC10.11 R30.2 TP7.TP
N$39: R29.1 SJ12.2
N$40: R30.1 SJ13.2
N$41: R69.1 SJ14.1
N$42: R70.1 SJ15.1
N$50: R27.1 SJ1.2
N$53: IC3.8 R74.2
N$54: LED14.C R69.2
N$55: LED15.C R70.2
N$56: IC3.6 R75.2
N$57: IC3.5 R76.2
N$58: IC3.4 R77.2
N$59: IC3.3 R78.2
N$60: IC3.2 R79.2
N$61: IC3.1 R80.2
N$62: IC3.52 R81.2
N$63: IC3.51 R82.2
N$64: IC3.50 R83.2
N$65: IC3.49 R84.2
N$66: IC3.48 R85.2
N$67: IC3.47 R86.2
N$68: IC3.46 R87.2
N$69: IC3.45 R88.2
N$70: IC3.44 R89.2
N$71: IC3.43 R90.2
N$72: IC3.42 R91.2
N$73: IC3.41 R92.2
N$74: IC3.40 R93.2
N$75: IC3.39 R94.2
N$76: IC3.37 R95.2
N$85: IC3.35 R96.2
N$86: IC3.34 R97.2
N$87: IC3.33 R98.2
N$88: IC3.32 R99.2
N$89: IC3.31 R100.2
POWER_FROM_USB_RüCKWAND: F2.1 POWER_CON_2.1 POWER_CON_2.3
PUSHBUTTON: C18.1 ENC1.D ENC2.6 FFC2.11 R24.1
PUSHBUTTON_TO_CONNECTOR: D6.C FFC1.6 IC8.14
PWM_DOWN: C27.1 FFC2.7 R9.2 T2.1 T2.2
PWM_DOWN_TO_CONNECTOR: D10.C FFC1.10 IC8.22
PWM_UP: C28.1 FFC2.9 R8.2 T1.1 T1.2
PWM_UP_TO_CONNECTOR: D5.C FFC1.8 IC8.21
RESET_ATMEL: C5.1 IC8.4 R7.1 XW1.5
RTC8564_INT: IC2.10 IC8.11 R20.1
SCK: IC8.3 XW1.3
SCL: CON_TOUCH_SENSOR_2.3 IC2.6 IC8.19 IC9.3 R52.1 TP6.TP
SCL_TOUCH_SENSOR: CON_TOUCH_SENSOR_1.4 IC6.14 R17.2 TP12.TP
SDA: CON_TOUCH_SENSOR_2.4 IC2.7 IC8.20 IC9.4 R53.1 TP5.TP
SDA_TOUCH_SENSOR: CON_TOUCH_SENSOR_1.3 IC6.11 R19.2 TP13.TP
SET+: C12.1 FFC2.5 R64.2 T3.1 T3.2
SET+_TO_CONNECTOR: D4.C FFC1.12 IC8.23
SET-: C10.1 FFC2.3 R72.2 T4.1 T4.2
SET-_TO_CONNECTOR: D3.C FFC1.14 IC8.24
SOUND: IC8.44 R10.2
SUPPLY_3V3_BEDIENMODUL: FFC2.2 FFC2.4 FFC2.6 FFC2.8 R8.1 R9.1 R12.2 R22.2 R23.2 R24.2 R25.1 R64.1 R72.1
SUPPLY_3V3_DCF77: A3.3 C11.1 C25.1 CON_DCF_1.5 CON_DCF_1.6 IC10.14 LED14.A LED15.A R71.1 TP18.TP
SUPPLY_RTC: C1.1 C30.+ C31.PLUS D1.C IC2.4 R4.2
USB_D+: POWER_CON_1.2 XB3.3
USB_D-: POWER_CON_1.5 XB3.2
VBUS_USB_RüCKWAND: POWER_CON_1.4 POWER_CON_1.6 XB3.1
VCC: C17.1 C20.1 C22.+ C29.+ D7.C IC1.7 IC1.8 IC4.6 IC11.1 R21.1 TP10.TP
VIBRO_MOTOR: IC8.43 R1.2
XTAL_1: C3.1 IC8.8 Q2.1
XTAL_2: C4.1 IC8.7 Q2.2